# EAGLE board pc_sensything_lite_v1.2 (EAGLE 6.6.0)
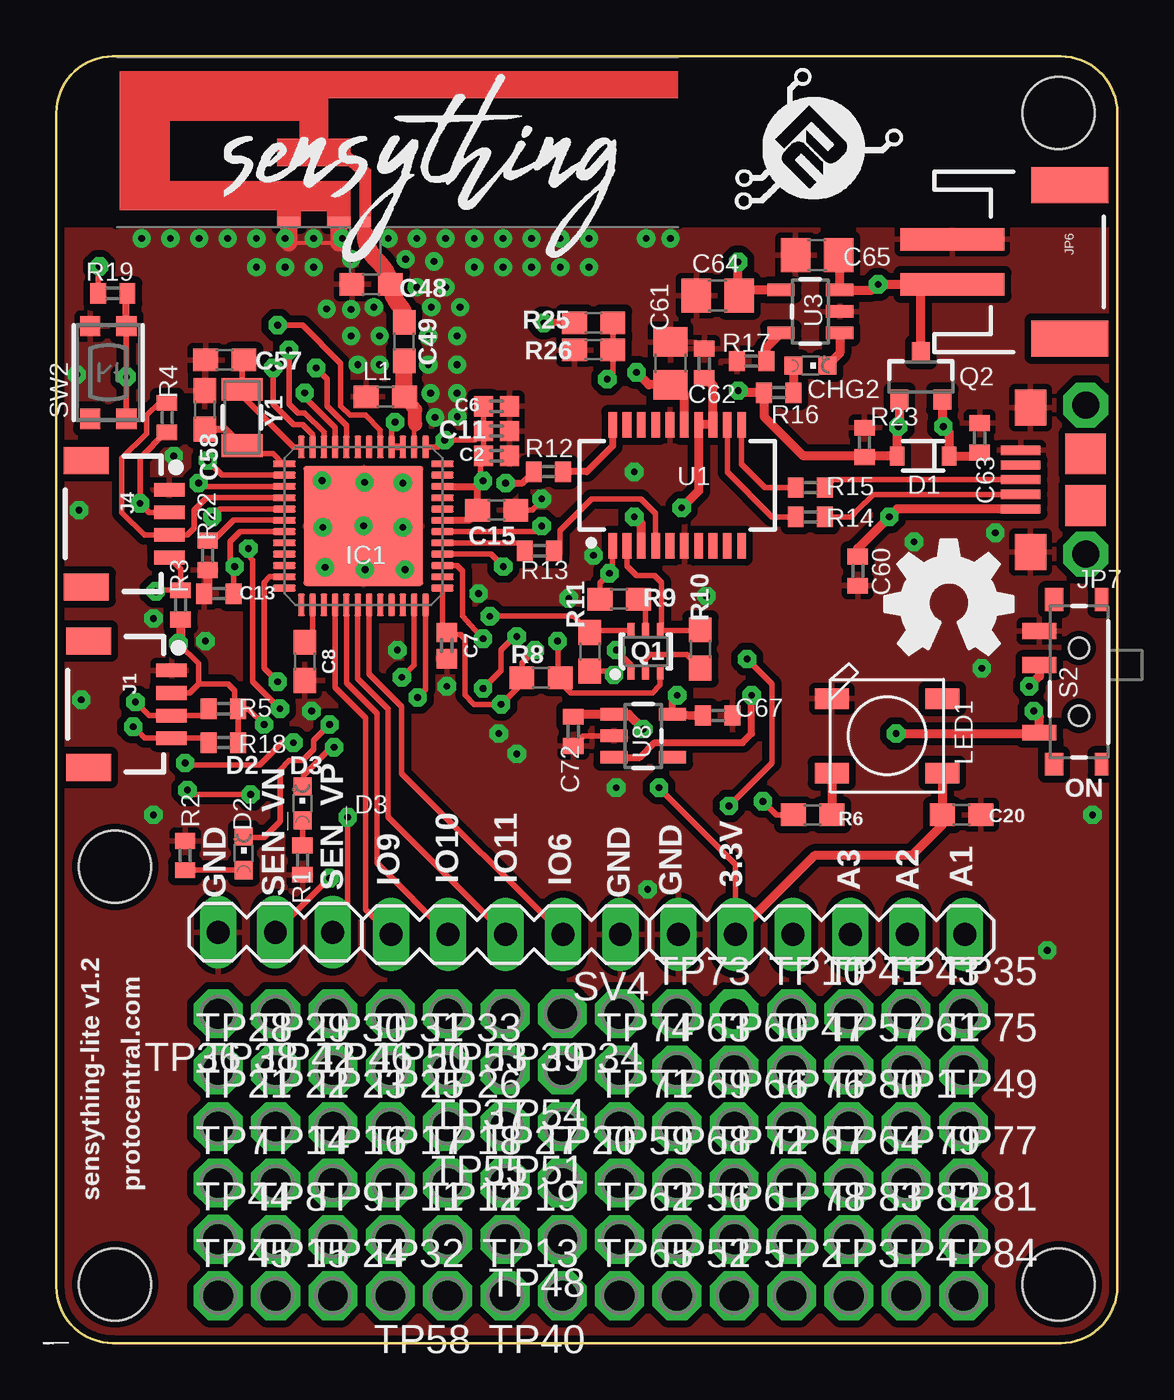
[diagram p0: board, top side]
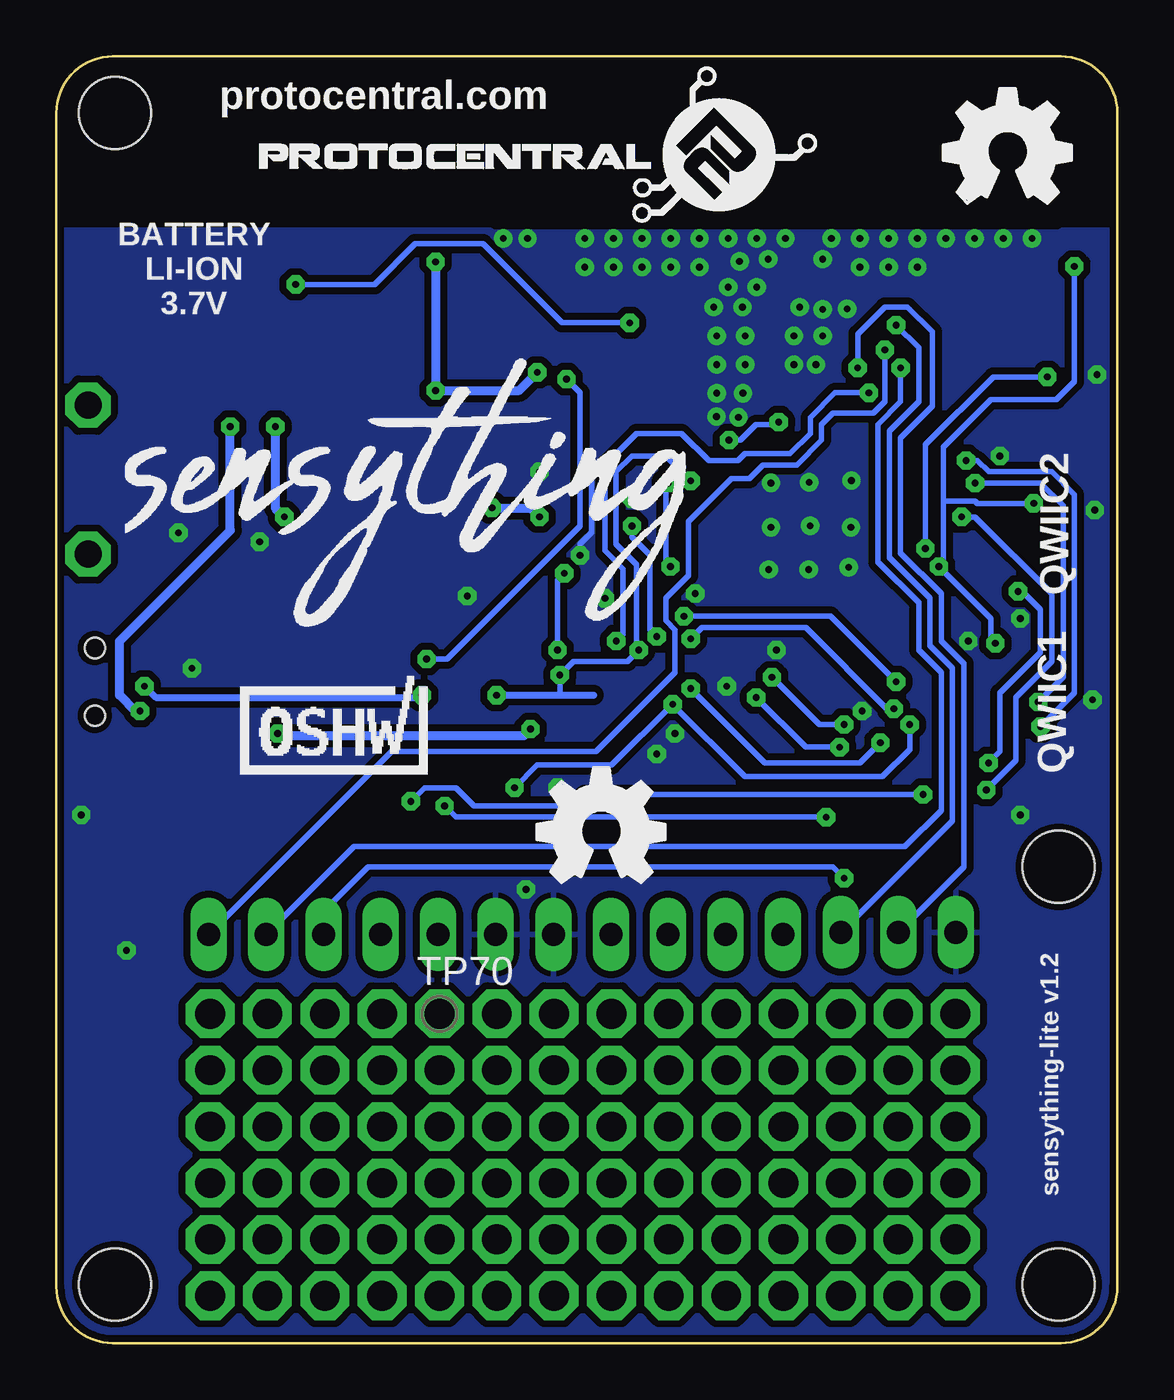
[diagram p1: board, bottom side, seen from below]

Size 47 x 57 mm. Coordinates in mm from the lower left corner, seen from the top.
Outline: 2.5,0 44.5,0 arc90 47,2.5 47,54.5 arc90 44.5,57 2.5,57 arc90 0,54.5 0,2.5 arc90 2.5,0
Copper layers (1*2*15*16): Top 0.035mm / dielectric 1.5mm / Route2 0.035mm / dielectric 0.15mm / Route15 0.035mm / dielectric 0.2mm / Bottom 0.035mm
Design rules "Circuitects-Rules": minimum track width 6mil, minimum drill 0.3mm, track to track 6mil, track to pad 6mil, pad to pad 6mil, via to via 6mil, smd to smd 6mil, copper to edge 10mil, drill to drill 8mil, minimum pad ring 12mil, minimum via ring 10mil, stop-mask expansion 4mil, vias tented up to drill 25mil, thermal gap 10mil
Net classes: 2 gnd: width 0.102 mm, drill 0.1 mm; 4 USBpair: width 0.102 mm, drill 0.1 mm, clearance 0.15 mm to class 3
Holes 3.2 mm at 2.6,2.6 44.4,2.6 44.4,54.5 2.6,21.1

## Footprints (pad centres in the part's own frame; a part is rotated, then mirrored left to right if it is on the bottom)
0402 = smd 0.85 x 0.9: 1 -0.58,0; 2 0.58,0
0603 = smd 1.1 x 1: 1 -0.85,0; 2 0.85,0
C0402 = smd 0.7 x 0.9: 1 -0.65,0; 2 0.65,0
C0805 = smd 1.3 x 1.5: 1 -0.95,0; 2 0.95,0
CHIPLED_0603 = smd 0.8 x 0.8: A 0,-0.75; C 0,0.75
SOD-323 = smd 0.63 x 0.83: A 1.15,0; C -1.15,0
TRACE_ANTENNA_2.4GHZ_25.7MM_TUNED = smd 0.46 x 0.46: ANT 0,0.23 | smd 1 x 0.46: GND -1.18,0.23; GND2 -3.38,0.23
QFN48 = smd 1 x 0.3: 1 -3.5,2.75; 2 -3.5,2.25; 3 -3.5,1.75; 4 -3.5,1.25; 5 -3.5,0.75; 6 -3.5,0.25; 7 -3.5,-0.25; 8 -3.5,-0.75; 9 -3.5,-1.25; 10 -3.5,-1.75; 11 -3.5,-2.25; 12 -3.5,-2.75; 25 3.5,-2.75; 26 3.5,-2.25; 27 3.5,-1.75; 28 3.5,-1.25; 29 3.5,-0.75; 30 3.5,-0.25; 31 3.5,0.25; 32 3.5,0.75; 33 3.5,1.25; 34 3.5,1.75; 35 3.5,2.25; 36 3.5,2.75 | smd 0.3 x 1: 13 -2.75,-3.5; 14 -2.25,-3.5; 15 -1.75,-3.5; 16 -1.25,-3.5; 17 -0.75,-3.5; 18 -0.25,-3.5; 19 0.25,-3.5; 20 0.75,-3.5; 21 1.25,-3.5; 22 1.75,-3.5; 23 2.25,-3.5; 24 2.75,-3.5; 37 2.75,3.5; 38 2.25,3.5; 39 1.75,3.5; 40 1.25,3.5; 41 0.75,3.5; 42 0.25,3.5; 43 -0.25,3.5; 44 -0.75,3.5; 45 -1.25,3.5; 46 -1.75,3.5; 47 -2.25,3.5; 48 -2.75,3.5 | smd 5.309 x 5.309: EXP 0,0
1X04_1MM_RA = smd 0.6 x 1.35: 1 -1.5,0; 2 -0.5,0; 3 0.5,0; 4 1.5,0 | smd 1.2 x 2: NC1 2.8,-3.675; NC2 -2.8,-3.675
JST-2-SMD = smd 1 x 4.6: 1 -1,-3.7; 2 1,-3.7 | smd 1.6 x 3.4: NC1 -3.4,1.5; NC2 3.4,1.5
MICRO-B = smd 0.4 x 1.75: 1 -1.25,2.975; 2 -0.6,2.975; 3 0.05,2.975; 4 0.7,2.975; 5 1.35,2.975 | smd 1.8 x 1.8: P$1 -1.1,0.1; P$2 1.2,0.1 | drill 1.2 pad 2 octagon: P$3 -3.25,0.1; P$4 3.35,0.1 | smd 1.6 x 1.4: P$5 -3.15,2.55; P$6 3.25,2.55
WS2812B = smd 1.5 x 0.9: 1-VDD 2.45,-1.65; 2-DOUT 2.45,1.65; 3-GND -2.45,1.65; 4-DIN -2.45,-1.65
SC70-6 = smd 0.3 x 0.66: 1 -0.65,-0.92; 2 0,-0.92; 3 0.65,-0.92; 4 0.65,0.92; 5 0,0.92; 6 -0.65,0.92
SOT23-3 = smd 0.8 x 0.9: 1 -0.95,-1; 2 0.95,-1; 3 0,1.1
R0402 = smd 0.7 x 0.9: 1 -0.65,0; 2 0.65,0
SWITCH-SPST-SMD-A = smd 0.7 x 1.5: 1 -2.25,-1.75; 2 -0.75,-1.75; 3 2.25,-1.75 | smd 1 x 0.6: GND1 -3.65,1; GND3 3.65,1 | smd 1 x 0.8: GND2 -3.65,-1.1; GND4 3.65,-1.1 | hole 0.9: -1.5,0; 1.5,0
MA03-1 = drill 1.016 long: 1 -2.54,0; 2 0,0; 3 2.54,0
MA06-1 = drill 1.016 long: 1 -6.35,0; 2 -3.81,0; 3 -1.27,0; 4 1.27,0; 5 3.81,0; 6 6.35,0
MA05-1 = drill 1.016 long: 1 -5.08,0; 2 -2.54,0; 3 0,0; 4 2.54,0; 5 5.08,0
BTN_KMR2_4.6X2.8 = smd 0.9 x 0.9: A 2.05,0.8; A' -2.05,0.8; B 2.05,-0.8; B' -2.05,-0.8
P1-13 = drill 1.321 pad 2.159 octagon: TP 0,0
SSOP20_L = smd 0.381 x 1.143: 1 -2.857,-2.68; 2 -2.223,-2.68; 3 -1.587,-2.68; 4 -0.953,-2.68; 5 -0.318,-2.68; 6 0.318,-2.68; 7 0.953,-2.68; 8 1.587,-2.68; 9 2.223,-2.68; 10 2.857,-2.68; 11 2.857,2.68; 12 2.223,2.68; 13 1.587,2.68; 14 0.953,2.68; 15 0.318,2.68; 16 -0.318,2.68; 17 -0.953,2.68; 18 -1.587,2.68; 19 -2.223,2.68; 20 -2.857,2.68
SOT23-5 = smd 0.55 x 1.2: 1 -0.95,-1.3; 2 0,-1.3; 3 0.95,-1.3; 4 0.95,1.3; 5 -0.95,1.3
CRYSTAL-SMD-3.2X1.5MM = smd 1 x 1.8: P$1 -1.25,0; P$2 1.25,0

## Placement (x,y rotation side)
C2  0.1uF  [0402]  19.5,39.3 0 top
C6  0.1uF  [0402]  19.5,41.5 0 top
C7  0.1uF  [0402]  17.3,30.9 270 top
C8  DNP  [0603]  11,30.2 270 top
C11  0.1uF  [0402]  19.5,40.4 0 top
C13  10uF  [C0402]  7.2,33.2 180 top
C15  10uF  [0603]  19.5,36.9 0 top
C20  0.1uF  [0603]  40.1,23.4 0 top
C48  2.4pF  [0603]  13.94,46.91 180 top
C49  5.6pF  [0603]  15.41,44.37 90 top
C57  15pF  [0603]  7.46,43.55 0 top
C58  15pF  [0603]  6.57,41.34 270 top
C60  0.1uF  [C0402]  35.5,34.2 270 top
C61  10uF  [C0805]  27.2,43.4 90 top
C62  0.1uF  [C0402]  28.7,43.4 90 top
C63  1.0uF  [C0402]  40.9,40.1 90 top
C64  4.7u  [C0805]  29.3,46.4 180 top
C65  4.7u  [C0805]  33.7,48.2 180 top
C67  2.2uF  [C0402]  29.3,27.8 0 top
C72  1u  [C0402]  22.9,27.1 90 top
CHG2  RED  [CHIPLED_0603]  33.4,43.3 270 top
D1  BAT20J  [SOD-323]  38.4,39.3 180 top
D2  DNP  [CHIPLED_0603]  8.3,21.7 0 top
D3  DNP  [CHIPLED_0603]  10.9,23.9 0 top
E1  ANTENNA  [TRACE_ANTENNA_2.4GHZ_25.7MM_TUNED]  13.69,49.45 0 top
IC1  CY8C29666_QFN48  [QFN48]  13.6,36.2 270 top
J1  [1X04_1MM_RA]  5.1,28.3 270 top
J4  [1X04_1MM_RA]  5,36.3 270 top
JP6  [JST-2-SMD]  43.4,47.9 270 top
JP7  MICRO-B  [MICRO-B]  45.7,38.2 90 top
L1  2.7nH  [0603]  14.57,41.92 180 top
LED1  WS2812B5050  [WS2812B]  36.8,26.9 0 top
LOGO1  OSHW_LOGO_FILLX0200-NT  [OSHW_FILLX200_NOTEXT]  36.7,30.5 0 top
LOGO2  OSHW_LOGO_FILLX0200-NT  [OSHW_FILLX200_NOTEXT]  25.7,20.4 0 bottom
LOGO3  OSHW_LOGO_FILLX0200-NT  [OSHW_FILLX200_NOTEXT]  7.7,50.5 0 bottom
Q1  MBT3904DW1T1  [SC70-6]  26.1,30.64 0 top
Q2  2.5A/30V  [SOT23-3]  38.3,42.8 0 top
R1  DNP  [R0402]  10.9,21.4 90 top
R2  DNP  [R0402]  5.7,21.6 270 top
R3  10K  [R0402]  5.5,32.7 270 top
R4  10K  [R0402]  4.9,41 270 top
R5  10K  [R0402]  7.4,28.1 0 top
R6  10k  [0603]  33.5,23.4 180 top
R8  10k  [0603]  21.47,29.48 180 top
R9  10k  [0603]  24.93,32.95 0 top
R10  10k  [0603]  28.53,30.75 270 top
R11  10k  [0603]  23.63,30.63 270 top
R12  1K  [R0402]  21.8,38.6 0 top
R13  1K  [R0402]  21.4,35.1 0 top
R14  27  [R0402]  33.4,36.6 180 top
R15  27  [R0402]  33.4,37.9 180 top
R16  330R  [R0402]  32,42.1 0 top
R17  1k  [R0402]  30.8,43.5 0 top
R18  10K  [R0402]  7.4,26.6 0 top
R19  10K  [R0402]  2.5,46.5 180 top
R22  DNP  [R0402]  6.7,34.9 90 top
R23  10K  [R0402]  35.8,39.9 270 top
R25  10k  [0603]  23.8,45.2 180 top
R26  10k  [0603]  23.8,44 0 top
S2  PCM12SMTR  [SWITCH-SPST-SMD-A]  45.3,29.29 270 top
SV1  [MA03-1]  9.7,18.2 0 top
SV2  [MA06-1]  33.9,18.1 180 top
SV4  [MA05-1]  19.9,18.1 180 top
SW2  KMR2  [BTN_KMR2_4.6X2.8]  2.3,43 90 top
TP1  PTR1PAD1-13  [P1-13]  37.65,9.59 0 top
TP2  PTR1PAD1-13  [P1-13]  32.57,2.09 0 top
TP3  PTR1PAD1-13  [P1-13]  35.11,2.09 0 top
TP4  PTR1PAD1-13  [P1-13]  37.65,2.09 0 top
TP5  PTR1PAD1-13  [P1-13]  30.03,2.09 0 top
TP6  PTR1PAD1-13  [P1-13]  30.03,4.59 0 top
TP7  PTR1PAD1-13  [P1-13]  7.17,7.09 0 top
TP8  PTR1PAD1-13  [P1-13]  9.71,4.59 0 top
TP9  PTR1PAD1-13  [P1-13]  12.25,4.59 0 top
TP10  PTR1PAD1-13  [P1-13]  32.57,14.59 0 top
TP11  PTR1PAD1-13  [P1-13]  14.79,4.59 0 top
TP12  PTR1PAD1-13  [P1-13]  17.33,4.59 0 top
TP13  PTR1PAD1-13  [P1-13]  19.87,2.09 0 top
TP14  PTR1PAD1-13  [P1-13]  9.71,7.09 0 top
TP15  PTR1PAD1-13  [P1-13]  9.71,2.09 0 top
TP16  PTR1PAD1-13  [P1-13]  12.25,7.09 0 top
TP17  PTR1PAD1-13  [P1-13]  14.79,7.09 0 top
TP18  PTR1PAD1-13  [P1-13]  17.33,7.09 0 top
TP19  PTR1PAD1-13  [P1-13]  19.87,4.59 0 top
TP20  PTR1PAD1-13  [P1-13]  22.41,7.09 0 top
TP21  PTR1PAD1-13  [P1-13]  7.17,9.59 0 top
TP22  PTR1PAD1-13  [P1-13]  9.71,9.59 0 top
TP23  PTR1PAD1-13  [P1-13]  12.25,9.59 0 top
TP24  PTR1PAD1-13  [P1-13]  12.25,2.09 0 top
TP25  PTR1PAD1-13  [P1-13]  14.79,9.59 0 top
TP26  PTR1PAD1-13  [P1-13]  17.33,9.59 0 top
TP27  PTR1PAD1-13  [P1-13]  19.87,7.09 0 top
TP28  PTR1PAD1-13  [P1-13]  7.17,12.09 0 top
TP29  PTR1PAD1-13  [P1-13]  9.71,12.09 0 top
TP30  PTR1PAD1-13  [P1-13]  12.25,12.09 0 top
TP31  PTR1PAD1-13  [P1-13]  14.79,12.09 0 top
TP32  PTR1PAD1-13  [P1-13]  14.79,2.09 0 top
TP33  PTR1PAD1-13  [P1-13]  17.33,12.09 0 top
TP34  PTR1PAD1-13  [P1-13]  24.95,14.59 180 top
TP35  PTR1PAD1-13  [P1-13]  40.19,14.59 0 top
TP36  PTR1PAD1-13  [P1-13]  7.17,14.59 180 top
TP37  PTR1PAD1-13  [P1-13]  19.87,12.09 180 top
TP38  PTR1PAD1-13  [P1-13]  9.71,14.59 180 top
TP39  PTR1PAD1-13  [P1-13]  22.41,14.59 180 top
TP40  PTR1PAD1-13  [P1-13]  22.41,2.09 180 top
TP41  PTR1PAD1-13  [P1-13]  35.11,14.59 0 top
TP42  PTR1PAD1-13  [P1-13]  12.25,14.59 180 top
TP43  PTR1PAD1-13  [P1-13]  37.65,14.59 0 top
TP44  PTR1PAD1-13  [P1-13]  7.17,4.6 0 top
TP45  PTR1PAD1-13  [P1-13]  7.17,2.09 0 top
TP46  PTR1PAD1-13  [P1-13]  14.79,14.59 180 top
TP47  PTR1PAD1-13  [P1-13]  32.57,12.09 0 top
TP48  PTR1PAD1-13  [P1-13]  22.41,4.59 180 top
TP49  PTR1PAD1-13  [P1-13]  40.19,9.59 0 top
TP50  PTR1PAD1-13  [P1-13]  17.33,14.59 180 top
TP51  PTR1PAD1-13  [P1-13]  22.41,9.59 180 top
TP52  PTR1PAD1-13  [P1-13]  27.49,2.09 0 top
TP53  PTR1PAD1-13  [P1-13]  19.87,14.59 180 top
TP54  PTR1PAD1-13  [P1-13]  22.41,12.09 180 top
TP55  PTR1PAD1-13  [P1-13]  19.87,9.59 180 top
TP56  PTR1PAD1-13  [P1-13]  27.49,4.59 0 top
TP57  PTR1PAD1-13  [P1-13]  35.11,12.09 0 top
TP58  PTR1PAD1-13  [P1-13]  17.33,2.09 180 top
TP59  PTR1PAD1-13  [P1-13]  24.95,7.09 0 top
TP60  PTR1PAD1-13  [P1-13]  30.03,12.09 0 top
TP61  PTR1PAD1-13  [P1-13]  37.65,12.09 0 top
TP62  PTR1PAD1-13  [P1-13]  24.95,4.59 0 top
TP63  PTR1PAD1-13  [P1-13]  27.49,12.09 0 top
TP64  PTR1PAD1-13  [P1-13]  35.11,7.09 0 top
TP65  PTR1PAD1-13  [P1-13]  24.95,2.09 0 top
TP66  PTR1PAD1-13  [P1-13]  30.03,9.59 0 top
TP67  PTR1PAD1-13  [P1-13]  32.57,7.09 0 top
TP68  PTR1PAD1-13  [P1-13]  27.49,7.09 0 top
TP69  PTR1PAD1-13  [P1-13]  27.49,9.59 0 top
TP70  PTR1PAD1-13  [P1-13]  30.03,14.59 0 bottom
TP71  PTR1PAD1-13  [P1-13]  24.95,9.59 0 top
TP72  PTR1PAD1-13  [P1-13]  30.03,7.09 0 top
TP73  PTR1PAD1-13  [P1-13]  27.49,14.59 0 top
TP74  PTR1PAD1-13  [P1-13]  24.95,12.09 0 top
TP75  PTR1PAD1-13  [P1-13]  40.19,12.09 0 top
TP76  PTR1PAD1-13  [P1-13]  32.57,9.59 0 top
TP77  PTR1PAD1-13  [P1-13]  40.19,7.09 0 top
TP78  PTR1PAD1-13  [P1-13]  32.57,4.59 0 top
TP79  PTR1PAD1-13  [P1-13]  37.65,7.09 0 top
TP80  PTR1PAD1-13  [P1-13]  35.11,9.59 0 top
TP81  PTR1PAD1-13  [P1-13]  40.19,4.59 0 top
TP82  PTR1PAD1-13  [P1-13]  37.65,4.59 0 top
TP83  PTR1PAD1-13  [P1-13]  35.11,4.59 0 top
TP84  PTR1PAD1-13  [P1-13]  40.19,2.09 0 top
U1  FTS31XS-U  [SSOP20_L]  27.5,38 0 top
U3  MCP73831  [SOT23-5]  33.4,45.7 90 top
U8  AP2112K-3.3V  [SOT23-5]  26,26.9 270 top
U$2  [SENSYTHING]  44.7,31.6 0 bottom
U$4  [SENSYTHING_SMALL]  6.9,47.8 0 top
U$6  [LOGO-PROTY]  30,50.1 0 top
U$22  [CERT-SMALL-SILK]  34.7,25.2 0 bottom
U$26  PROTY_LOGO_WITH_TEXT  [PROTY_WITH_TEXT@1]  38,50 0 bottom
Y1  32.768kHz  [CRYSTAL-SMD-3.2X1.5MM]  8.22,41.01 270 top

## Library data of the parts
C2 C6 C7 C11 = SparkFun-Capacitors; PROD_ID: CAP-12416
C8 C20 = SparkFun-Capacitors; PROD_ID: CAP-00810
C13 C60-C65 C67 C72 R1-R5 R12-R19 R22 R23 = rcl
C15 = SparkFun-Capacitors; PROD_ID: CAP-11015
C48 = esp32-thing-temp; PROD_ID: CAP-13541
C49 = esp32-thing-temp; PROD_ID: CAP-12456
C57 C58 = SparkFun-Capacitors; PROD_ID: CAP-07881
CHG2 D2 D3 = led
D1 = SparkFun-DiscreteSemi; PROD_ID: DIO-11623
E1 = esp32-thing-temp
IC1 = cypresspsoc_0.30
J1 J4 = SparkFun-Connectors; PROD_ID: CONN-13694
JP6 U3 = SparkFun
JP7 U$2 U$4 U$6 U$26 = circuitects
L1 = SparkFun-Passives; PROD_ID: NDUC-08762
LED1 = adafruit
LOGO1-LOGO3 = ohw-logo
Q1 = esp32-thing-temp; PROD_ID: TRANS-13337
Q2 = SparkFun-DiscreteSemi; PROD_ID: TRANS-11308
R6 R8-R11 R25 R26 = SparkFun-Resistors; PROD_ID: RES-00824
S2 = SparkFun-Electromechanical; PROD_ID: SWCH-10651
SV1 SV2 SV4 = con-lstb; OC_FARNELL: unknown; OC_NEWARK: unknown
SW2 = microbuilder
TP1-TP84 = testpad
U1 = SparkFun-DigitalIC; PROD_ID: IC-11524
U8 = SparkFun-PowerIC; PROD_ID: VREG-12457
U$22 = OSHWA
Y1 = SparkFun-Clocks; PROD_ID: XTAL-13062

## Nets
0: IC1.23 Q1.6 R11.1
3.3V: C2.1 C6.1 C7.1 C11.1 C13.1 C15.1 C20.1 C67.1 IC1.1 IC1.3 IC1.4 IC1.19 IC1.37 IC1.43 IC1.46 J1.2 J4.2 LED1.1-VDD R3.2 R4.2 R5.2 R8.2 R11.2 R18.2 R19.2 SV2.5 U8.5
3.3V_F: C62.1 U1.3 U1.13 U1.14
32K_XN: C58.2 IC1.13 Y1.P$2
32K_XP: C57.2 IC1.12 Y1.P$1
ADC1: IC1.10 SV2.1
ADC2: IC1.11 SV2.2
ADC3: IC1.8 SV1.2 SV2.3
AIN3: SV2.4
BAT_MON: IC1.5 R25.1 R26.2 SV1.3
BUTTON: IC1.39 R19.1 SW2.B SW2.B'
CHIP_PU: IC1.9 Q1.3 R8.1
D+: JP7.3 R15.1
D-: JP7.2 R14.1
DTR: Q1.1 R9.1 U1.1
EN: S2.2 U8.3
GND: C2.2 C6.2 C7.2 C8.2 C11.2 C13.2 C15.2 C20.2 C48.2 C57.1 C58.1 C60.2 C61.2 C62.2 C63.2 C64.2 C65.2 C67.2 C72.1 E1.GND E1.GND2 IC1.EXP J1.1 J4.1 JP6.1 JP7.5 JP7.P$5 JP7.P$6 L1.2 LED1.3-GND R1.1 R2.1 R17.1 R22.1 R23.1 R26.1 S2.1 SV1.1 SV2.6 SV4.1 SW2.A U1.6 U1.16 U3.2 U8.2
LED1: D3.C IC1.36
LED2: D2.C IC1.35
LNA_IN: C49.1 IC1.2 L1.1
N$1: C8.1 IC1.26
N$2: IC1.18 R22.2
N$3: D3.A R1.2
N$4: Q1.5 R9.2
N$5: D2.A R2.2
N$6: LED1.4-DIN R6.1
N$8: IC1.38
N$9: Q1.2 R10.2
N$11: IC1.28 SV4.5
N$12: IC1.29 SV4.4
N$13: IC1.30 SV4.3
N$14: IC1.31 SV4.2
N$20: R14.2 U1.12
N$21: R15.2 U1.11
N$22: CHG2.C U3.1
N$29: CHG2.A R16.2
N$31: R17.2 U3.5
RTS: Q1.4 R10.1 U1.2
RXD: R13.2 U1.4
SCL: IC1.42 J4.4 R3.1
SCL1: IC1.14 J1.4 R18.1
SDA: IC1.16 J4.3 R4.1
SDA1: IC1.15 J1.3 R5.1
SENSOR_CAPN: IC1.7
TRACE_ANT2: C48.1 C49.2 E1.ANT
TXD: R12.2 U1.20
U0RXD: IC1.40 R12.1
U0TXD: IC1.41 R13.1
VBAT: C65.1 JP6.2 Q2.3 R25.2 U3.3
VIN: C63.1 C72.2 D1.C Q2.2 S2.3 U8.1
VUSB: C60.1 C61.1 C64.1 D1.A JP7.1 Q2.1 R16.1 R23.2 U1.15 U3.4
WS2812: IC1.17 R6.2

## Tracks (layer width: path | path; a pad name or v marks a point on that pad's centre or on a via)
0  (via drill 0.3)
  Top 0.254: Q1.6 23.71,31.56 R11.1 22.9,32.2 v19.2,32.2 | IC1.23 9.45,33.95 9.2,33.7 9.2,29.9 v9.8,29.3
  Bottom 0.254: v19.2,32.2 12.7,32.2 v9.8,29.3
3.3V  (via drill 0.3)
  Top 0.254: IC1.1 16.9,39.7 v17.2,40 18.52,40 C11.1 | IC1.4 14.85,40.65 v15,40.8 | C11.1 C2.1 | C6.1 C11.1 | J1.2 5.9,28.8 6.3,29.2 | 6.3,29.2 7.6,29.2 7.9,28.9 7.9,28.25 R5.2 | 18.8,39.08 18.8,38.3 v18.9,38.2 | J4.2 4.1,36.8 v3.7,37.2 3.7,39.2 4.85,40.35 R4.2 | R19.2 1.85,47.65 v1.9,47.7 | R11.2 24.52,29.78 v24.7,29.6 | 17.32,31.5 C7.1 | IC1.37 17.1,31.68 C7.1 | 6.3,29.2 6.3,30.1 v5.4,31 | v21.2,30.7 20.62,30.12 R8.2 20.62,29.22 v19.7,28.3 18.5,28.3 18.1,28.7 18.1,31.2 17.9,31.4 17.38,31.4 C7.1 | R5.2 8.5,28.1 v9.2,27.4 | R18.2 R5.2 | SV2.5 30.09,21.21 v26.7,24.6 | C13.1 7.85,34.35 v7.9,34.4 7.7,34.6 7.7,35.5 8.15,35.95 IC1.19
  Top 0.305: IC1.43 18.3,36.45 C15.1 18.65,37.85 18.55,37.95 | IC1.3 IC1.4 | IC1.46 18.55,37.95 | 18.8,39.08 C2.1 | 18.55,37.95 18.65,37.95 v18.9,38.2 | U8.5 27.3,28.5 v27.5,28.7
  Top 0.406: U8.5 C67.1 | LED1.1-VDD C20.1 39.25,22.95 37.9,21.6 33.59,21.6 SV2.5 | R3.2 5.5,31.1 v5.4,31
  Bottom 0.254: v17.2,40 16.7,40 16,40.7 15.1,40.7 v15,40.8 | 7.7,37.3 7.7,34.6 v7.9,34.4 5.6,32.1 5.6,31.2 v5.4,31 | 7.7,37.3 7.7,39.7 5.6,41.8 2.7,41.8 1.9,42.6 v1.9,47.7 | 24.6,28.7 24.7,28.8 v24.7,29.6 24.1,30.2 21.7,30.2 21.3,30.6 | v18.9,38.2 20,39.3 21.5,39.3 22.2,38.6 22.2,35.4 21.3,34.5 21.3,30.6 | 21.3,30.6 v21.2,30.7 | v26.7,24.6 25.7,25.6 22.4,25.6 v19.7,28.3 16.5,25.1 10.4,25.1 9.2,26.3 v9.2,27.4 | v3.7,37.2 6.2,37.2 6.3,37.3 7.7,37.3
  Bottom 0.305: v27.5,28.7 24.6,28.7 23.2,28.7
3.3V_F  (via drill 0.3)
  Top 0.406: C62.1 29.09,42.44 U1.13 U1.14 28.45,37.75 v27.7,37 | U1.3 25.91,36.29 v25.6,36.6
  Bottom 0.406: v27.7,37 26,37 v25.6,36.6
32K_XN
  Top 0.254: Y1.P$2 8.94,39.56 9.1,39.4 9.6,39.4 10.05,38.95 IC1.13
  Top 0.305: C58.2 7.49,40.49 Y1.P$2
32K_XP
  Top 0.254: C57.2 8.22,43.37 Y1.P$1 8.22,41.98 10.5,39.7 IC1.12
ADC1  (via drill 0.3)
  Top 0.254: 11.85,39.95 IC1.10 11.85,40.35 11,41.2 10.7,41.2 10.3,41.6 v10.3,44
  Bottom 0.254: v10.3,44 10.3,41.7 10.8,41.2 12.6,41.2 13.1,40.7 13.1,40 14.2,38.9 15.7,38.9 16.3,38.3 17.1,38.3 19,36.4 19,34 20,33 20,32 19.6,31.6 19.6,29.7 23.1,26.2 32.15,26.2 SV2.1
ADC2  (via drill 0.3)
  Top 0.254: IC1.11 11.35,40.25 10.9,40.7 10.5,40.7 9.6,41.6 v9.6,43.2
  Bottom 0.254: v9.6,43.2 9.6,41.7 10.6,40.7 10.6,34.6 8.8,32.8 8.8,30.7 7.8,29.7 7.8,23.6 9.4,22 33.81,22 SV2.2
ADC3  (via drill 0.3)
  Top 0.254: IC1.8 12.85,40.65 12,41.5 12,42.7 v11.5,43.2 | SV1.2 v12.1,20.6
  Bottom 0.254: v11.5,43.2 11.5,44.7 10.3,45.9 9.3,45.9 8.2,44.8 8.2,41.5 9.6,40.1 9.6,35 7.8,33.2 7.8,31.1 6.8,30.1 6.8,21.1 SV1.2 | SV2.3 35.17,19.13 33.2,21.1 12.6,21.1 v12.1,20.6
BAT_MON  (via drill 0.3)
  Top 0.254: 24.65,44.5 R26.2 24.65,42.95 v24.4,42.7 | 24.65,44.5 R25.1 | 24.4,44.25 24.65,44.5 | v30.6,30.3 31.7,29.2 31.7,25.7 v29.8,23.8 | IC1.5 14.35,40.45 13.7,41.1 13,41.1 12.6,41.5 12.6,43.4 10.9,45.1 v9.8,45.1 | v12.9,23.3 12.9,18.86 SV1.3
  Bottom 0.254: v30.6,30.3 29.7,30.3 23.8,36.2 23.8,42.1 v24.4,42.7 | v12.9,23.3 29.3,23.3 v29.8,23.8 | v9.8,45.1 8.8,44.1 8.8,41.7 10.1,40.4 10.1,34.8 8.3,33 8.3,30.9 7.3,29.9 7.3,23.14 SV1.3
BUTTON  (via drill 0.3)
  Top 0.254: SW2.B' v3.1,42.8 SW2.B | v8.5,35.2 8.5,34.9 8.7,34.7 8.7,29.3 v9.9,28.1 | IC1.39 17.75,34.45 18,34.2 18,32.2 v18.9,31.2
  Top 0.305: SW2.B 3.1,46.45 R19.1
  Bottom 0.254: v8.5,35.2 8.5,39.8 5.5,42.8 v3.1,42.8 | v18.9,31.2 18.4,31.7 13.8,31.7 10.2,28.1 v9.9,28.1
CHIP_PU  (via drill 0.3)
  Top 0.254: Q1.3 26.75,29.15 26.4,28.8 22.8,28.8 22.22,29.38 | R8.1 22.22,29.38 | IC1.9 12.35,40.55 11,41.9 v11,42.1 | 22.22,29.38 22.22,30.88 v22.2,31.1
  Bottom 0.254: v22.2,31.1 21.9,31.4 21.9,34.3 22.7,35.1 22.7,38.9 21.3,40.3 19.3,40.3 18.1,39.1 16.8,39.1 16.5,39.4 14.5,39.4 13.6,40.3 13.6,41 12.5,42.1 v11,42.1
D+
  Top 0.254: 34.05,37.85 R15.1 34.4,38.25 JP7.3
D-
  Top 0.254: JP7.2 36.2,37.6 35.45,36.85 35.3,36.7 35.2,36.6 R14.1
DTR  (via drill 0.3)
  Top 0.254: U1.1 24.64,34.24 v24.5,34.1 24.08,33.68 R9.1 | Q1.1 25.45,30.05 v24.8,30.7
  Bottom 0.254: v24.8,30.7 24.8,33.8 v24.5,34.1
EN  (via drill 0.3)
  Top 0.305: U8.3 25.85,25.95 26.5,26.6 30.4,26.6 30.8,27 v30.8,28.7
  Top 0.406: S2.2 43.55,29.55 v43.1,29.1
  Bottom 0.305: v43.1,29.1 42.6,28.6 30.9,28.6 v30.8,28.7
GND  (via drill 0.3)
  Top 0.178: 12.51,48.73 10.31,48.73
  Top 0.254: U8.2 23.35,26.9 C72.1 | C15.2 21.1,36.9 v21.5,37.4
  Top 0.406: R22.1 6.7,33.35 C13.2
  Top 0.762: E1.GND 12.51,48.73 | 10.31,48.73 E1.GND2
  Bottom 0.254: v23.8,34.9 23.8,35.4 23.3,35.9 23.3,39.3 23.2,39.4
  other vias: 11.8,36.13 13.61,36.2 11.78,38.2 15.35,36.13 15.45,34.27 13.68,34.27 11.9,34.37 10.13,48.94 8.86,48.94 7.59,48.94 6.32,48.94 5.05,48.94 3.78,48.94 11.4,48.94 12.67,48.94 14.7,48.94 15.97,48.94 17.24,48.94 18.51,48.94 19.78,48.94 21.05,48.94 22.32,48.94 23.59,48.94 26.13,48.94 27.2,48.94 13.05,48.02 15.46,48.02 14.07,45.89 16.61,45.89 15.97,46.78 14.32,44.62 16.48,44.62 14.32,43.35 16.48,43.35 16.58,42.08 16.78,41.01 17.76,41.04 13.05,44.62 13.35,43.35 13.05,45.79 11.4,47.67 10.13,47.67 8.86,47.67 16.73,47.92 17.24,46.78 17.88,45.89 17.75,44.62 17.75,43.35 17.75,42.08 18.51,47.67 19.78,47.67 21.05,47.67 22.32,47.67 23.59,47.67 13.66,38.13 11.97,45.82 15.35,38.1 26.2,20.1 0.9,42.9 22.7,33 41,29.9 28.8,33.1 38,35.5 1,36.9 4.3,32.1 20.4,26.1 15.1,30.7 19.6,27 25.6,38.6 1.1,28.5 11.3,28 6.6,31.1 24.8,24.6 5.2,39.3 41.6,35.9 45.9,23.4 17.3,29.1 43.9,17.4 4.3,23.4 18.7,33.2
  pour Bottom (isolate 0.305, rank 6): 47,49.3 47.5,0.1 0,-0.1 0,49.3
  pour Top (isolate 0.305, rank 6): 0,0 46.9,0.3 47,49.3 0,49.3
LED1  (via drill 0.3)
  Top 0.254: IC1.36 16.35,28.95 v16,28.6 | D3.C 10.95,24.65 10.95,25.15 12.2,26.4 v12.3,26.4
  Bottom 0.254: v16,28.6 13.8,26.4 v12.3,26.4
LED2  (via drill 0.3)
  Top 0.254: IC1.35 15.85,30.05 v15.3,29.5 | v12.1,27.4 11.4,26.7 11.4,26.3 10.9,25.8 10.3,25.8 9.9,25.4 9.9,23.1 9.2,22.4 8.35,22.4 D2.C
  Bottom 0.254: v15.3,29.5 13.2,27.4 v12.1,27.4
LNA_IN
  Top 0.2: IC1.2 15.85,40.65 15.9,40.7
  Top 0.305: 15.41,41.84 L1.1
  Top 0.61: L1.1 15.9,41.35 15.9,40.7
  Top 0.762: 15.41,41.84 C49.1
N$1
  Top 0.254: IC1.26 11.35,31.5 C8.1
N$2
  Top 0.254: 6.85,35.55 R22.2 6.95,35.55 7.85,36.45 IC1.18
N$3
  Top 0.254: D3.A R1.2
N$4
  Top 0.254: Q1.5 26.1,32.73 R9.2
N$5
  Top 0.254: R2.2 D2.A
N$6
  Top 0.406: LED1.4-DIN R6.1
N$9
  Top 0.254: Q1.2 26.1,30.3 26.3,30.5 27.93,30.5 R10.2
N$11
  Top 0.254: IC1.28 12.35,29.05 13.7,27.7 13.7,19.22 SV4.5
N$12
  Top 0.254: IC1.29 12.85,29.25 14.2,27.9 14.2,21.26 SV4.4
N$13
  Top 0.254: IC1.30 13.35,29.45 14.7,28.1 14.7,23.3 SV4.3
N$14
  Top 0.254: IC1.31 13.85,29.65 15.3,28.2 15.3,25.24 SV4.2
N$20
  Top 0.254: R14.2 31.7,36.6 29.72,38.58 U1.12
N$21
  Top 0.254: R15.2 31.4,37.9 30.36,38.94 U1.11
N$22
  Top 0.406: U3.1 34.7,43.85 CHG2.C
N$29
  Top 0.406: CHG2.A R16.2
N$31
  Top 0.406: R17.2 31.45,44.1 U3.5
RTS
  Top 0.254: U1.2 25.28,34.42 25.7,34 26.5,34 26.8,33.7 26.8,31.61 Q1.4 28.49,31.56 R10.1
RXD
  Top 0.254: U1.4 26.55,36.75 25.9,37.4 23.7,37.4 22.3,36 22.3,34.95 R13.2
SCL  (via drill 0.3)
  Top 0.254: IC1.42 21.25,35.95 v21.5,36.2 | 5.55,33.3 R3.1 | R3.1 4.45,33.35 v4.4,33.3 | v20.4,31.3 20.3,31.3 19.7,30.7 19.7,29.8 v18.9,29 | v10.5,26.6 10,26.6 9,25.6 5.8,25.6 v5.7,25.7 | R3.1 5.5,34.3 J4.4
  Bottom 0.254: v4.4,33.3 4.2,33.3 3.4,32.5 3.4,30.6 5.2,28.8 5.2,26.2 v5.7,25.7 | v21.5,36.2 21.5,35.7 20.7,34.9 20.7,31.6 v20.4,31.3 | v18.9,29 15.6,25.7 11.4,25.7 v10.5,26.6 10.8,26.3
SCL1  (via drill 0.3)
  Top 0.254: v3.4,27.3 3.9,26.8 J1.4 6.55,26.8 R18.1 | IC1.14 7.35,38.45 v6.7,39.1
  Bottom 0.254: v3.4,27.3 1.9,28.8 1.9,37.6 2.9,38.6 5.7,38.6 6.2,39.1 v6.7,39.1
SDA
  Top 0.254: R4.1 4.55,41.65 4,41.1 4,40.3 2.9,39.2 2.9,36.8 3.9,35.8 J4.3 5.8,35.8 6.1,36.1 6.1,36.9 6.65,37.45 IC1.16
SDA1  (via drill 0.3)
  Top 0.254: IC1.15 6.45,37.95 v6.3,38.1 | v3.5,28.4 4.1,27.8 J1.3 6.5,27.8 6.75,28.05 R5.1
  Bottom 0.254: v3.5,28.4 2.4,29.5 2.4,37.1 3.4,38.1 v6.3,38.1
TRACE_ANT2
  Top 0.178: E1.ANT 13.69,49.12
  Top 0.762: 13.69,49.12 arc46 14.22,47.95 arc-35 C48.1 arc33 15.26,45.89 arc-37 15.39,45.58 15.39,45.24 C49.2
TXD
  Top 0.305: U1.20 24.64,39.74 23.5,38.6 R12.2
U0RXD  (via drill 0.3)
  Top 0.254: IC1.40 19.25,34.95 v19.8,34.4
  Top 0.305: v19.9,38.1 20.65,38.1 R12.1
  Bottom 0.254: v19.8,34.4 20,34.6 20,38 v19.9,38.1
U0TXD
  Top 0.254: IC1.41 20.5,35.45 R13.1
VBAT  (via drill 0.3)
  Top 0.305: R25.2 v21.6,45.2
  Top 0.406: C65.1 34.7,48.15 U3.3 36.15,46.65 v36.4,46.9 38.4,46.9 | JP6.2 38.4,46.9 | Q2.3 38.3,46.8 38.4,46.9
  Bottom 0.254: v36.4,46.9 32.9,46.9 31.1,48.7 28.1,48.7 24.6,45.2 v21.6,45.2
VIN  (via drill 0.3)
  Top 0.406: C63.1 40.75,39.3 D1.C 39.55,40.35 v39.3,40.6 39.25,40.65 Q2.2 | v43.3,28 43.55,27.75 S2.3 43.51,27 v37.2,27 | v26,27.2 25.35,27.85 U8.1 23,27.85 C72.2
  Bottom 0.406: v26,27.2 26.3,26.9 37.1,26.9 v37.2,27 | v39.3,40.6 39.3,36 44.2,31.1 44.2,28.7 43.5,28 v43.3,28
VUSB  (via drill 0.3)
  Top 0.406: 35.85,39.3 D1.A 37.25,40.55 v37.3,40.6 37.35,40.65 Q2.1 | 35.85,39.3 R23.2 | U1.15 27.82,42.03 C61.1 26.25,42.45 v25.7,43 | 30.2,46.65 v30.2,47.9 | U3.4 30.2,46.65 | 30.2,46.65 C64.1 | 35.85,39.3 33.1,39.3 31.35,41.05 R16.1 30.3,42.1 v30.2,42.2 | JP7.1 37.25,36.95 v36.9,36.6 35.5,35.2 C60.1
  Bottom 0.406: v30.2,47.9 v30.2,42.2 26.5,42.2 v25.7,43 | v37.3,40.6 37.3,37 v36.9,36.6
WS2812  (via drill 0.3)
  Top 0.254: R6.2 31.9,23.4 v31.3,24 | IC1.17 7.25,36.95 v6.9,36.6 | v8.6,24.3 6,24.3 v5.8,24.5
  Bottom 0.254: v8.6,24.3 23.6,24.3 24.1,23.8 28.5,23.8 29.3,24.6 30.7,24.6 v31.3,24 | v6.9,36.6 6.3,36.6 2.9,33.2 2.9,30.2 4.5,28.6 4.5,25.8 v5.8,24.5

## Text on the board
tPlace: R17 | SEN_VN | SEN_VP | D3 | D2 | ON | IO10 | IO11 | GND | IO9 | IO6 | GND | GND | A3 | A2 | 3.3V | A1 | sensything-lite v1.2 | protocentral.com
bPlace: protocentral.com | BATTERY / LI-ION / 3.7V | QWIIC2 | QWIIC1 | sensything-lite v1.2